# Altium PCB PCB1.PcbDoc
Units mil, origin at the board's own origin, x right, y up, seen from the top; angles counter-clockwise.
Board outline 4625 x 2320 mil, 2 copper layers (Top Layer, Bottom Layer); 16 components, 16 nets, 44 pads, 22 vias.
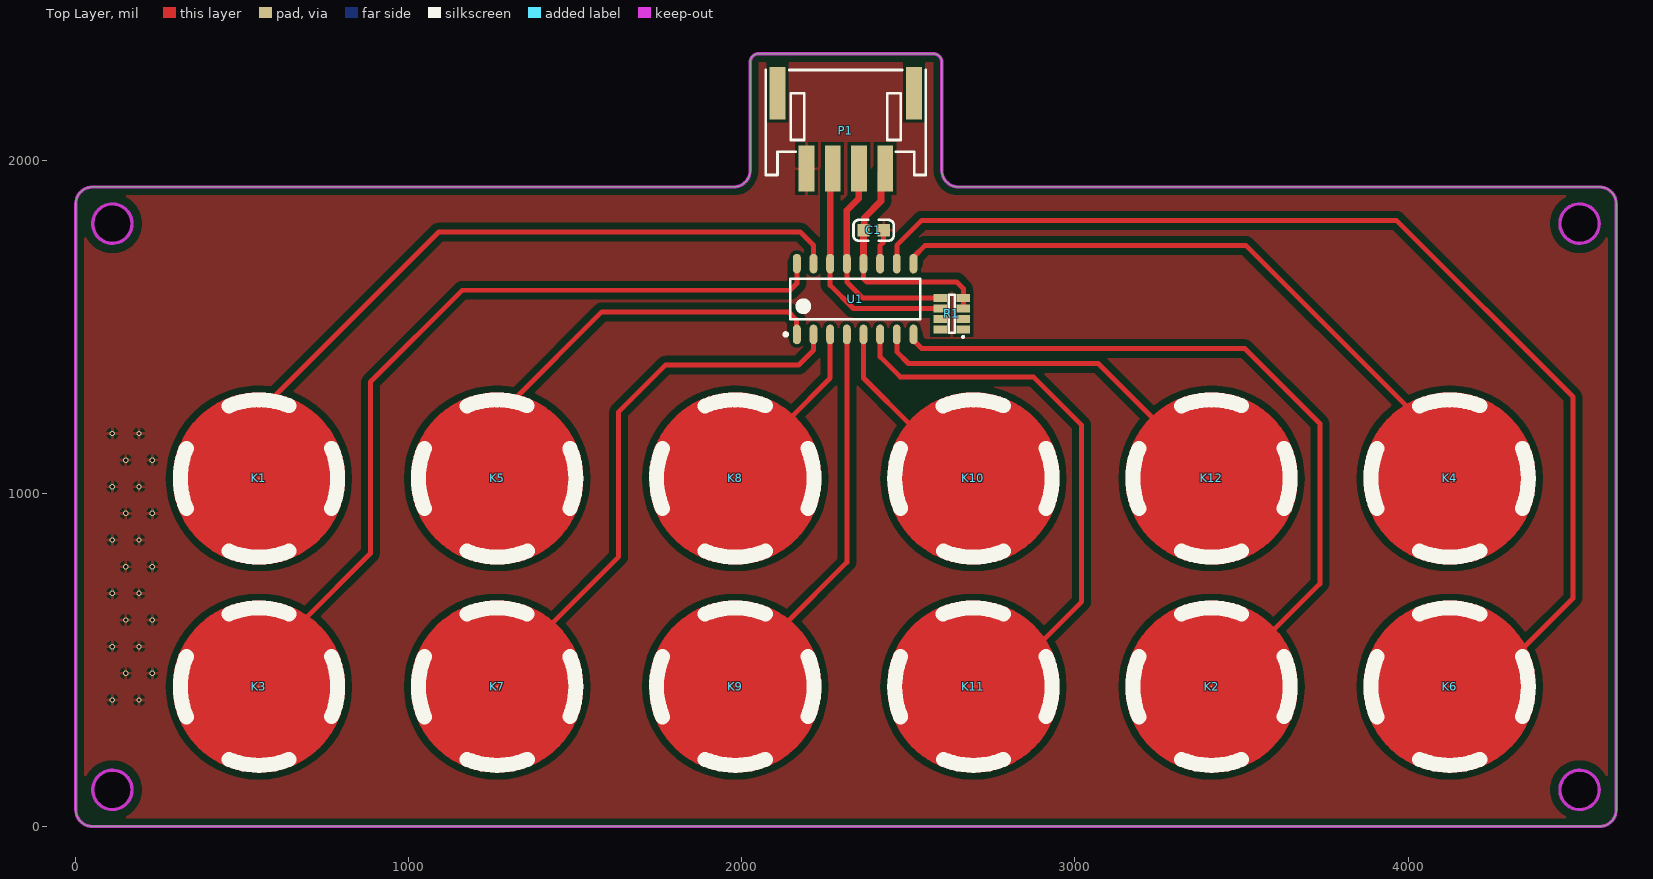
[diagram p0: Top Layer view]
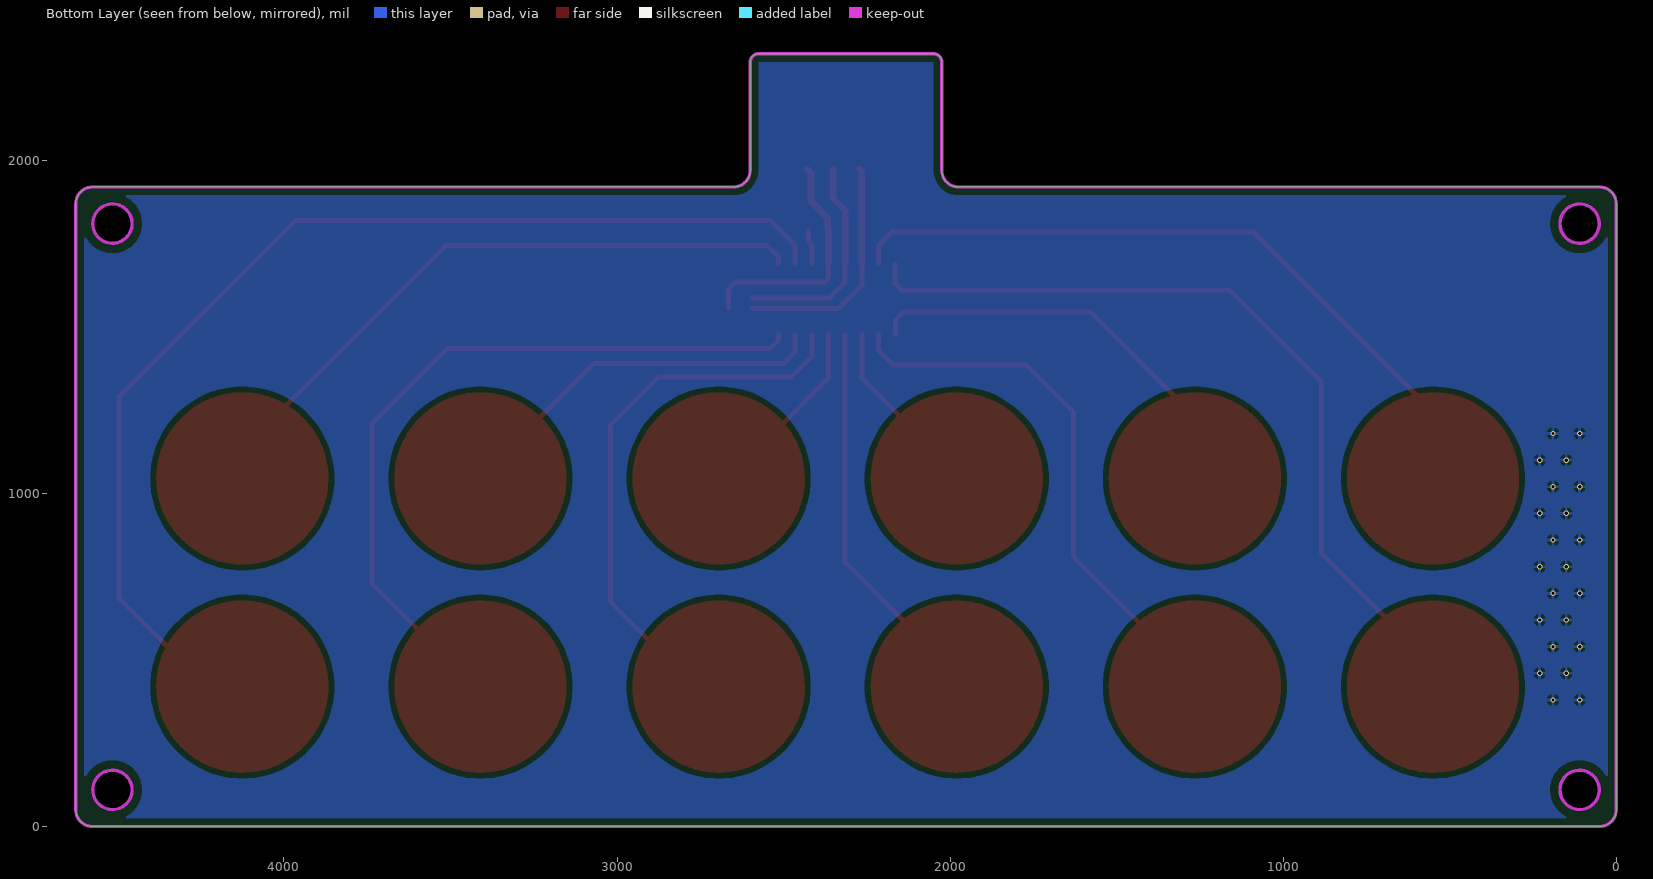
[diagram p1: Bottom Layer view, seen from below]

## Layer stack, top to bottom
Top Solder: solder mask 0.4, Solder Resist, Dk 3.5
Top Layer: signal copper 1.4
Dielectric 1: dielectric 12.6, FR-4, Dk 4.8
Bottom Layer: signal copper 1.4
Bottom Solder: solder mask 0.4, Solder Resist, Dk 3.5

## Board outline
50,0 cw(c50,50) 0,50 0,1870 cw(c50,1870) 50,1920 1975,1920 ccw(c1975,1970) 2025,1970 2025,2295 cw(c2050,2295) 2050,2320 2575,2320 cw(c2575,2295) 2600,2295 2600,1970 ccw(c2650,1970) 2650,1920 4575,1920 cw(c4575,1870) 4625,1870 4625,50 cw(c4575,50) 4575,0 4580,0
cut-out: 4455.94,1810 ccw(c4515,1810) 4515,1750.94 ccw(c4515,1810) 4574.06,1810 ccw(c4515,1810) 4515,1869.06 ccw(c4515,1810)
cut-out: 4455.94,110 ccw(c4515,110) 4515,50.94 ccw(c4515,110) 4574.06,110 ccw(c4515,110) 4515,169.06 ccw(c4515,110)
cut-out: 110,50.94 cw(c110,110) 50.94,110 cw(c110,110) 110,169.06 cw(c110,110) 169.06,110 cw(c110,110)
cut-out: 110,1750.94 cw(c110,1810) 50.94,1810 cw(c110,1810) 110,1869.06 cw(c110,1810) 169.06,1810 cw(c110,1810)

## Design rules (kind name [scope] priority, off if disabled: settings)
Clearance [All] p1: gap=10 ignorepadtopadclearanceinfootprint=FALSE except(0: Arc-Hole Track-Hole SMDPad-Hole THPad-Hole Via-Hole Fill-Hole Poly-Hole Region-Hole Text-Hole; 5: SMDPad-SMDPad; 15: Arc-Arc Arc-Track Track-Track; 20: Arc-Fill Arc-Poly Arc-Region Track-Fill Track-Poly Track-Region; 30: Fill-Fill Fill-Poly Fill-Region Poly-Poly Poly-Region Region-Region)
PolygonConnect [All] p1: connectstyle=Relief reliefconductorwidth=10 reliefentries=4 polygonreliefangle="90 Angle" airgapwidth=10
RoutingVias [All] p1: holewidth=28 width=50 viastyle="Through Hole" minholewidth=8 minwidth=12 maxholewidth=28 maxwidth=50
SolderMaskExpansion [All] p1: expansion=4 istentingtop=FALSE
Width [All] p1: maxlimit=200 minlimit=10 preferedwidth=10 minimp=50.000000 maximp=50.000000 favimp=50.000000
30 further rules are at their usual default settings.

## Components (designator, comment, footprint, x,y, rotation, side; value= is the part's Value field where it differs from the comment)
C1 "100nF (104) 10% 50V" 0603_C 2395.32,1790 r0 top
K1 "TouchPad" KEY0 550,1045 r0 top
K2 "TouchPad" KEY9 3410,420 r0 top
K3 "TouchPad" Key1 550,420 r0 top
K4 "TouchPad" confirm 4125,1045 r0 top
K5 "TouchPad" KEY2 1265,1045 r0 top
K6 "TouchPad" concel 4125,420 r0 top
K7 "TouchPad" KEY3 1265,420 r0 top
K8 "TouchPad" KEY4 1980,1045 r0 top
K9 "TocuhPad" KEY5 1980,420 r0 top
K10 "TouchPad" KEY6 2695,1045 r0 top
K11 "TouchPad" KEY7 2695,420 r0 top
K12 "TouchPad" KEY8 3410,1045 r0 top
P1 "4PIN" PH2.0WS-4P 2302.26,2124.12 r180 top
R1 "Res-4" res-4 2628,1537.01 r180 top
U1 "TouchPad IC" SOP127P600X175-16N 2340,1583.7 r90 top

## Footprints (in the part's own frame and the unit in brackets; to place one, negate y for a bottom-side part, rotate by r counter-clockwise, add the part's x,y. Pads: shape width x height; smd on the part's side, far side on the other; paste and mask are expansions set on the pad)
0603_C [mm]
  rect 0.93x0.98 smd: 1(-0.77,0) 2(0.77,0)
  silkscreen extent -1.53,-0.79 1.54,0.79, body extent -0.8,-0.4 0.8,0.4, height 0.3
concel [mm]
  round 0.1 smd: 1(0,0)
  Top Layer region: 0,-6 -2.296,-5.543 -4.243,-4.243 -5.543,-2.296 -6,0 -6,0 -5.543,2.296 -4.243,4.243 -2.296,5.543 0,6 0,6 2.296,5.543 4.243,4.243 5.543,2.296 6,0 6,0 5.543,-2.296 4.243,-4.243 2.296,-5.543 0,-6
  Top Layer lines w1.143: 5.267,2.873 ccw(c0,0) 6,0 ccw(c0,0) 5.267,2.873
  silkscreen extent -6,-6 6,6
confirm [mm]
  round 0.1 smd: 1(0,0)
  Top Layer region: 0,-6 -2.296,-5.543 -4.243,-4.243 -5.543,-2.296 -6,0 -6,0 -5.543,2.296 -4.243,4.243 -2.296,5.543 0,6 0,6 2.296,5.543 4.243,4.243 5.543,2.296 6,0 6,0 5.543,-2.296 4.243,-4.243 2.296,-5.543 0,-6
  Top Layer lines w1.143: -2.977,5.209 ccw(c0,0) 6,0 ccw(c0,0) -2.977,5.209
  silkscreen extent -6,-6 6,6
KEY0 [mm]
  round 0.1 smd: 1(0,0)
  Top Layer region: 0,-6 -2.296,-5.543 -4.243,-4.243 -5.543,-2.296 -6,0 -6,0 -5.543,2.296 -4.243,4.243 -2.296,5.543 0,6 0,6 2.296,5.543 4.243,4.243 5.543,2.296 6,0 6,0 5.543,-2.296 4.243,-4.243 2.296,-5.543 0,-6
  Top Layer lines w1.143: -0.488,5.98 cw(c0,0) 6,0 cw(c0,0) -0.488,5.98
  silkscreen extent -6,-6 6,6
Key1 [mm]
  round 0.1 smd: 1(0,0)
  Top Layer region: 0,-6 -2.296,-5.543 -4.243,-4.243 -5.543,-2.296 -6,0 -6,0 -5.543,2.296 -4.243,4.243 -2.296,5.543 0,6 0,6 2.296,5.543 4.243,4.243 5.543,2.296 6,0 6,0 5.543,-2.296 4.243,-4.243 2.296,-5.543 0,-6
  Top Layer lines w1.143: 3.333,4.989 ccw(c0,0) 6,0 ccw(c0,0) 3.333,4.989
  silkscreen extent -6,-6 6,6
KEY2 [mm]
  round 0.1 smd: 1(0,0)
  Top Layer region: 0,-6 -2.296,-5.543 -4.243,-4.243 -5.543,-2.296 -6,0 -6,0 -5.543,2.296 -4.243,4.243 -2.296,5.543 0,6 0,6 2.296,5.543 4.243,4.243 5.543,2.296 6,0 6,0 5.543,-2.296 4.243,-4.243 2.296,-5.543 0,-6
  Top Layer lines w1.143: 1.171,5.885 ccw(c0,0) 6,0 ccw(c0,0) 1.171,5.885
  silkscreen extent -6,-6 6,6
KEY3 [mm]
  round 0.1 smd: 1(0,0)
  Top Layer region: 0,-6 -2.296,-5.543 -4.243,-4.243 -5.543,-2.296 -6,0 -6,0 -5.543,2.296 -4.243,4.243 -2.296,5.543 0,6 0,6 2.296,5.543 4.243,4.243 5.543,2.296 6,0 6,0 5.543,-2.296 4.243,-4.243 2.296,-5.543 0,-6
  Top Layer lines w1.143: 4.243,4.243 ccw(c0,0) 6,0 ccw(c0,0) 4.243,4.243
  silkscreen extent -6,-6 6,6
KEY4 [mm]
  round 0.1 smd: 1(0,0)
  Top Layer region: 0,-6 -2.296,-5.543 -4.243,-4.243 -5.543,-2.296 -6,0 -6,0 -5.543,2.296 -4.243,4.243 -2.296,5.543 0,6 0,6 2.296,5.543 4.243,4.243 5.543,2.296 6,0 6,0 5.543,-2.296 4.243,-4.243 2.296,-5.543 0,-6
  Top Layer lines w1.143: 4.029,4.446 ccw(c0,0) 6,0 ccw(c0,0) 4.029,4.446
  silkscreen extent -6,-6 6,6
KEY5 [mm]
  round 0.1 smd: 1(0,0)
  Top Layer region: 0,-6 -2.296,-5.543 -4.243,-4.243 -5.543,-2.296 -6,0 -6,0 -5.543,2.296 -4.243,4.243 -2.296,5.543 0,6 0,6 2.296,5.543 4.243,4.243 5.543,2.296 6,0 6,0 5.543,-2.296 4.243,-4.243 2.296,-5.543 0,-6
  Top Layer lines w1.143: 3.733,4.697 ccw(c0,0) 6,0 ccw(c0,0) 3.733,4.697
  silkscreen extent -6,-6 6,6
KEY6 [mm]
  round 0.1 smd: 1(0,0)
  Top Layer region: 0,-6 -2.296,-5.543 -4.243,-4.243 -5.543,-2.296 -6,0 -6,0 -5.543,2.296 -4.243,4.243 -2.296,5.543 0,6 0,6 2.296,5.543 4.243,4.243 5.543,2.296 6,0 6,0 5.543,-2.296 4.243,-4.243 2.296,-5.543 0,-6
  Top Layer lines w1.143: -4.589,3.865 ccw(c0,0) 6,0 ccw(c0,0) -4.589,3.865
  silkscreen extent -6,-6 6,6
KEY7 [mm]
  round 0.1 smd: 1(0,0)
  Top Layer region: 0,-6 -2.296,-5.543 -4.243,-4.243 -5.543,-2.296 -6,0 -6,0 -5.543,2.296 -4.243,4.243 -2.296,5.543 0,6 0,6 2.296,5.543 4.243,4.243 5.543,2.296 6,0 6,0 5.543,-2.296 4.243,-4.243 2.296,-5.543 0,-6
  Top Layer lines w1.143: 4.756,3.658 ccw(c0,0) 6,0 ccw(c0,0) 4.756,3.658
  silkscreen extent -6,-6 6,6
KEY8 [mm]
  round 0.1 smd: 1(0,0)
  Top Layer region: 0,-6 -2.296,-5.543 -4.243,-4.243 -5.543,-2.296 -6,0 -6,0 -5.543,2.296 -4.243,4.243 -2.296,5.543 0,6 0,6 2.296,5.543 4.243,4.243 5.543,2.296 6,0 6,0 5.543,-2.296 4.243,-4.243 2.296,-5.543 0,-6
  Top Layer lines w1.143: -4.181,4.304 ccw(c0,0) 6,0 ccw(c0,0) -4.181,4.304
  silkscreen extent -6,-6 6,6
KEY9 [mm]
  round 0.1 smd: 1(0,0)
  Top Layer region: 0,-6 -2.296,-5.543 -4.243,-4.243 -5.543,-2.296 -6,0 -6,0 -5.543,2.296 -4.243,4.243 -2.296,5.543 0,6 0,6 2.296,5.543 4.243,4.243 5.543,2.296 6,0 6,0 5.543,-2.296 4.243,-4.243 2.296,-5.543 0,-6
  Top Layer lines w1.143: 4.446,4.029 ccw(c0,0) 6,0 ccw(c0,0) 4.446,4.029
  silkscreen extent -6,-6 6,6
PH2.0WS-4P [mm]
  rect 1.2x4 smd: 0(-5.445,-1.962) 0(4.955,-1.962)
  rect 1.2x3.5 smd: 1(-3.245,3.788) 2(-1.245,3.788) 3(0.755,3.788) 4(2.755,3.788)
  silkscreen extent -6.34,-3.73 5.85,4.27, body extent -6.24,-3.61 5.76,4.99, height 5.55
res-4 [mil] "排阻"
  rect 40x23.62 smd: 1(-37,45) 2(-37,13.5) 3(-37,-17.99) 4(-37,-49.49) 5(33,-49.49) 6(33,-17.99) 7(33,13.5) 8(33,45)
  silkscreen extent -37,-60 7,68, body extent -33,-66 30,60, height 23
SOP127P600X175-16N [mm] "SOP, 16-Leads, Body 9.90x3.90mm, Pitch 1.27mm, IPC Medium Density"
  oval 1.5x0.6 smd: 1(-2.7,4.445) 2(-2.7,3.175) 3(-2.7,1.905) 4(-2.7,0.635) 5(-2.7,-0.635) 6(-2.7,-1.905) 7(-2.7,-3.175) 8(-2.7,-4.445) 9(2.7,-4.445) 10(2.7,-3.175) 11(2.7,-1.905) 12(2.7,-0.635) 13(2.7,0.635) 14(2.7,1.905) 15(2.7,3.175) 16(2.7,4.445)
  silkscreen extent -2.82,-4.95 1.55,5.42, body extent -3,-4.95 3,4.95, height 1.75

## Part data
C1: library part "0603 100nF (104) 10% 50V", "贴片电容", Package=0603, SuppliersPartNumber=C14663, ComponentLink1Description=供应商链接, ComponentLink1URL=http://www.szlcsc.com/product/details_15331.html, Supplier=LC
K1: library part Key0
K2: library part Key9
K3: library part Key1
K4: library part confirm
K5: library part Key2
K6: library part cancel
K7: library part Key3
K8: library part key4
K9: library part Key5
K10: library part Key6
K11: library part Key7
K12: library part Key8
P1: library part 接线端子-4PIN
R1: "排阻"
U1: library part BS8112A-3

## Via types
v1: diameter 16, hole 10, Top Layer to Bottom Layer, 22 vias

## Nets (pads, with @x,y where several pads share a name; then routed paths per layer and width w, separated by ;. In a path a pad name is that pad's centre, name@x,y a point inside that pad or via, vN(x,y) a via of type N, cw(c..) or ccw(c..) an arc to the next point about the centre after c; other vN are vias at no path point)
GND: C1.2 P1.4 U1.11 | length 104.4
  Top Layer w15: U1.11 2415,1745 2425,1755 2425,1789.37 C1.2
  other v1: 110,380 190,380 150,460 230,460 110,540 190,540 150,620 230,620 110,700 190,700 150,780 230,780 110,860 190,860 150,940 230,940 110,1020 190,1020 150,1100 230,1100 110,1180 190,1180
Key0: K1.1 U1.15 | length 1964.8
  Top Layer w15: 530.78,1280.44 585.44,1280.44 1090,1785 2175,1785 2215,1745 U1.15
Key1: K3.1 U1.16 | length 2265.2
  Top Layer w15: 681.24,616.41 885,820.17 885,1335 1160,1610 2145,1610 2165,1630 U1.16
Key2: K5.1 U1.1 | length 1018
  Top Layer w15: 1311.08,1276.68 1579.4,1545 2140,1545 2163.35,1521.65 2163.35,1479.05 U1.1
Key3: K7.1 U1.2 | length 1449
  Top Layer w15: 1432.03,587.03 1432.03,612.03 1630,810 1630,1245 1770,1385 2170,1385 2215,1430 U1.2
Key4: K8.1 U1.3 | length 309.7
  Top Layer w15: 2138.64,1220.03 2265,1346.39 U1.3
Key5: K9.1 U1.4 | length 950.4
  Top Layer w15: 2126.99,604.92 2315,792.93 U1.4
Key6: K10.1 U1.5 | length 342.1
  Top Layer w15: U1.5 2365,1346.47 2514.31,1197.16
Key7: K11.1 U1.6 | length 1471
  Top Layer w15: U1.6 2415,1410 2475,1350 2875,1350 3020,1205 3020,675 2909.03,564.03 2882.23,564.03
Key8: K12.1 U1.7 | length 920
  Top Layer w15: U1.7 2465,1425 2500,1390 3069.84,1390 3245.4,1214.44
Key9: K2.1 U1.8 | length 2034.6
  Top Layer w15: U1.8 2515,1459.68 2539.68,1435 3510,1435 3735,1210 3735,728.61 3585.03,578.64
Key10: K4.1 U1.9 | length 1732.3
  Top Layer w15: U1.9 2515,1710 2550,1745 3512.9,1745 4007.8,1250.1
Key11: K6.1 U1.10 | length 3166.1
  Top Layer w15: U1.10 2465,1745 2540,1820 3965,1820 4495,1290 4495,685 4343.11,533.11 4332.38,533.11
SCL: P1.2 R1.5 U1.13 | length 655.1
  Top Layer w15: U1.13 2315,1635 2363.19,1586.81 2594.68,1586.81 R1.5
  Top Layer w20: U1.13 2315,1850 2351.26,1886.26 P1.2
SDA: P1.3 R1.6 U1.14 | length 712.1
  Top Layer w15: U1.14 2265,1625 2335,1555 R1.6
  Top Layer w20: U1.14 2265.69,1690.69 2265.69,1968.17 P1.3
VCC: C1.1 P1.1 R1.3 R1.4 U1.12 | length 729.4
  Top Layer w15: U1.12 2365,1645 2375,1635 2645,1635 2665,1615 R1.3
  Top Layer w20: U1.12 C1.1 2367.51,1792.51 2367.51,1827.51 2417.53,1877.53 2417.53,1962.53 P1.1
pads on no net: P1.0 R1.1 R1.2 R1.7 R1.8

## Polygon pours and split planes (outlines as drawn)
GND on Top Layer "Top-Layer GND" (solid, remove dead copper, pour order 0): 50,0 cw(c50,50) 0,50 0,1870 cw(c50,1870) 50,1920 1975,1920 ccw(c1975,1970) 2025,1970 2025,2295 cw(c2050,2295) 2050,2320 2575,2320 cw(c2575,2295) 2600,2295 2600,1970 ccw(c2650,1970) 2650,1920 4575,1920 cw(c4575,1870) 4625,1870 4625,50 cw(c4575,50) 4575,0 4580,0
GND on Bottom Layer "GND_L02_P001" (solid, pour order 1): 50,0 cw(c50,50) 0,50 0,1870 cw(c50,1870) 50,1920 1975,1920 ccw(c1975,1970) 2025,1970 2025,2295 cw(c2050,2295) 2050,2320 2575,2320 cw(c2575,2295) 2600,2295 2600,1970 ccw(c2650,1970) 2650,1920 4575,1920 cw(c4575,1870) 4625,1870 4625,50 cw(c4575,50) 4575,0 4580,0

## Keep-outs
Keep-Out Layer:
  circle w10: c4515,110 r59.06
  circle w10: c4515,1810 r59.06
  circle w10: c110,110 r59.06
  circle w10: c110,1810 r59.06
  lines w10: 4575,0 ccw(c4575,50) 4625,50 4625,1870 ccw(c4575,1870) 4575,1920 2650,1920 cw(c2650,1970) 2600,1970 2600,2295 ccw(c2575,2295) 2575,2320 2050,2320 ccw(c2050,2295) 2025,2295 2025,1970 cw(c1975,1970) 1975,1920 550,1920 50,1920 ccw(c50,1870) 0,1870 0,50 ccw(c50,50) 50,0 4580,0

## Other copper
Bottom Layer:
  pour cut-out: 3849.41,420 ccw(c4125,420) 4125,144.41 ccw(c4125,420) 4400.59,420 ccw(c4125,420) 4125,695.59 ccw(c4125,420)
  pour cut-out: 3849.41,1045 ccw(c4125,1045) 4125,769.41 ccw(c4125,1045) 4400.59,1045 ccw(c4125,1045) 4125,1320.59 ccw(c4125,1045)
  pour cut-out: 3134.41,420 ccw(c3410,420) 3410,144.41 ccw(c3410,420) 3685.59,420 ccw(c3410,420) 3410,695.59 ccw(c3410,420)
  pour cut-out: 3134.41,1045 ccw(c3410,1045) 3410,769.41 ccw(c3410,1045) 3685.59,1045 ccw(c3410,1045) 3410,1320.59 ccw(c3410,1045)
  pour cut-out: 2419.41,420 ccw(c2695,420) 2695,144.41 ccw(c2695,420) 2970.59,420 ccw(c2695,420) 2695,695.59 ccw(c2695,420)
  pour cut-out: 2419.41,420 ccw(c2695,420) 2695,144.41 ccw(c2695,420) 2970.59,420 ccw(c2695,420) 2695,695.59 ccw(c2695,420)
  pour cut-out: 2419.41,1045 ccw(c2695,1045) 2695,769.41 ccw(c2695,1045) 2970.59,1045 ccw(c2695,1045) 2695,1320.59 ccw(c2695,1045)
  pour cut-out: 1704.41,420 ccw(c1980,420) 1980,144.41 ccw(c1980,420) 2255.59,420 ccw(c1980,420) 1980,695.59 ccw(c1980,420)
  pour cut-out: 1704.41,1045 ccw(c1980,1045) 1980,769.41 ccw(c1980,1045) 2255.59,1045 ccw(c1980,1045) 1980,1320.59 ccw(c1980,1045)
  pour cut-out: 989.41,420 ccw(c1265,420) 1265,144.41 ccw(c1265,420) 1540.59,420 ccw(c1265,420) 1265,695.59 ccw(c1265,420)
  pour cut-out: 989.41,1045 ccw(c1265,1045) 1265,769.41 ccw(c1265,1045) 1540.59,1045 ccw(c1265,1045) 1265,1320.59 ccw(c1265,1045)
  pour cut-out: 550,144.41 cw(c550,420) 274.41,420 cw(c550,420) 550,695.59 cw(c550,420) 825.59,420 cw(c550,420)
  pour cut-out: 550,769.41 cw(c550,1045) 274.41,1045 cw(c550,1045) 550,1320.59 cw(c550,1045) 825.59,1045 cw(c550,1045)

## Silkscreen, mask and mechanical layers (free items; w line width, h text height)
Top Solder:
  text "TouchPad" at 99.58,1580.42 h150
  text "SFerret" at 99.65,1456.58 h190

## Text inside footprints (layer, text, board x,y; h text height)
K1: Top Solder "0" at 450,910.69 h472.44
K2: Top Solder "9" at 3310,285.69 h472.44
K3: Top Solder "1" at 450,280 h472.44
K4: Top Solder "确认" at 3950,993.12 h236.22
K5: Top Solder "2" at 1165,905 h472.44
K6: Top Solder "归零" at 3949.34,376.43 h236.22
K7: Top Solder "3" at 1165,285.69 h472.44
K8: Top Solder "4" at 1880,905 h472.44
K9: Top Solder "5" at 1880,285.69 h472.44
K10: Top Solder "6" at 2595,910.69 h472.44
K11: Top Solder "7" at 2595,280 h472.44
K12: Top Solder "8" at 3310,910.69 h472.44